# Altium PCB balance_car.PcbDoc (part 2 of 4)
Units mil, origin at the board's own origin, x right, y up, seen from the top; angles counter-clockwise.
Board outline 5041 x 1892 mil, 2 copper layers (Top Layer, Bottom Layer); 151 components, 112 nets, 599 pads, 108 vias.
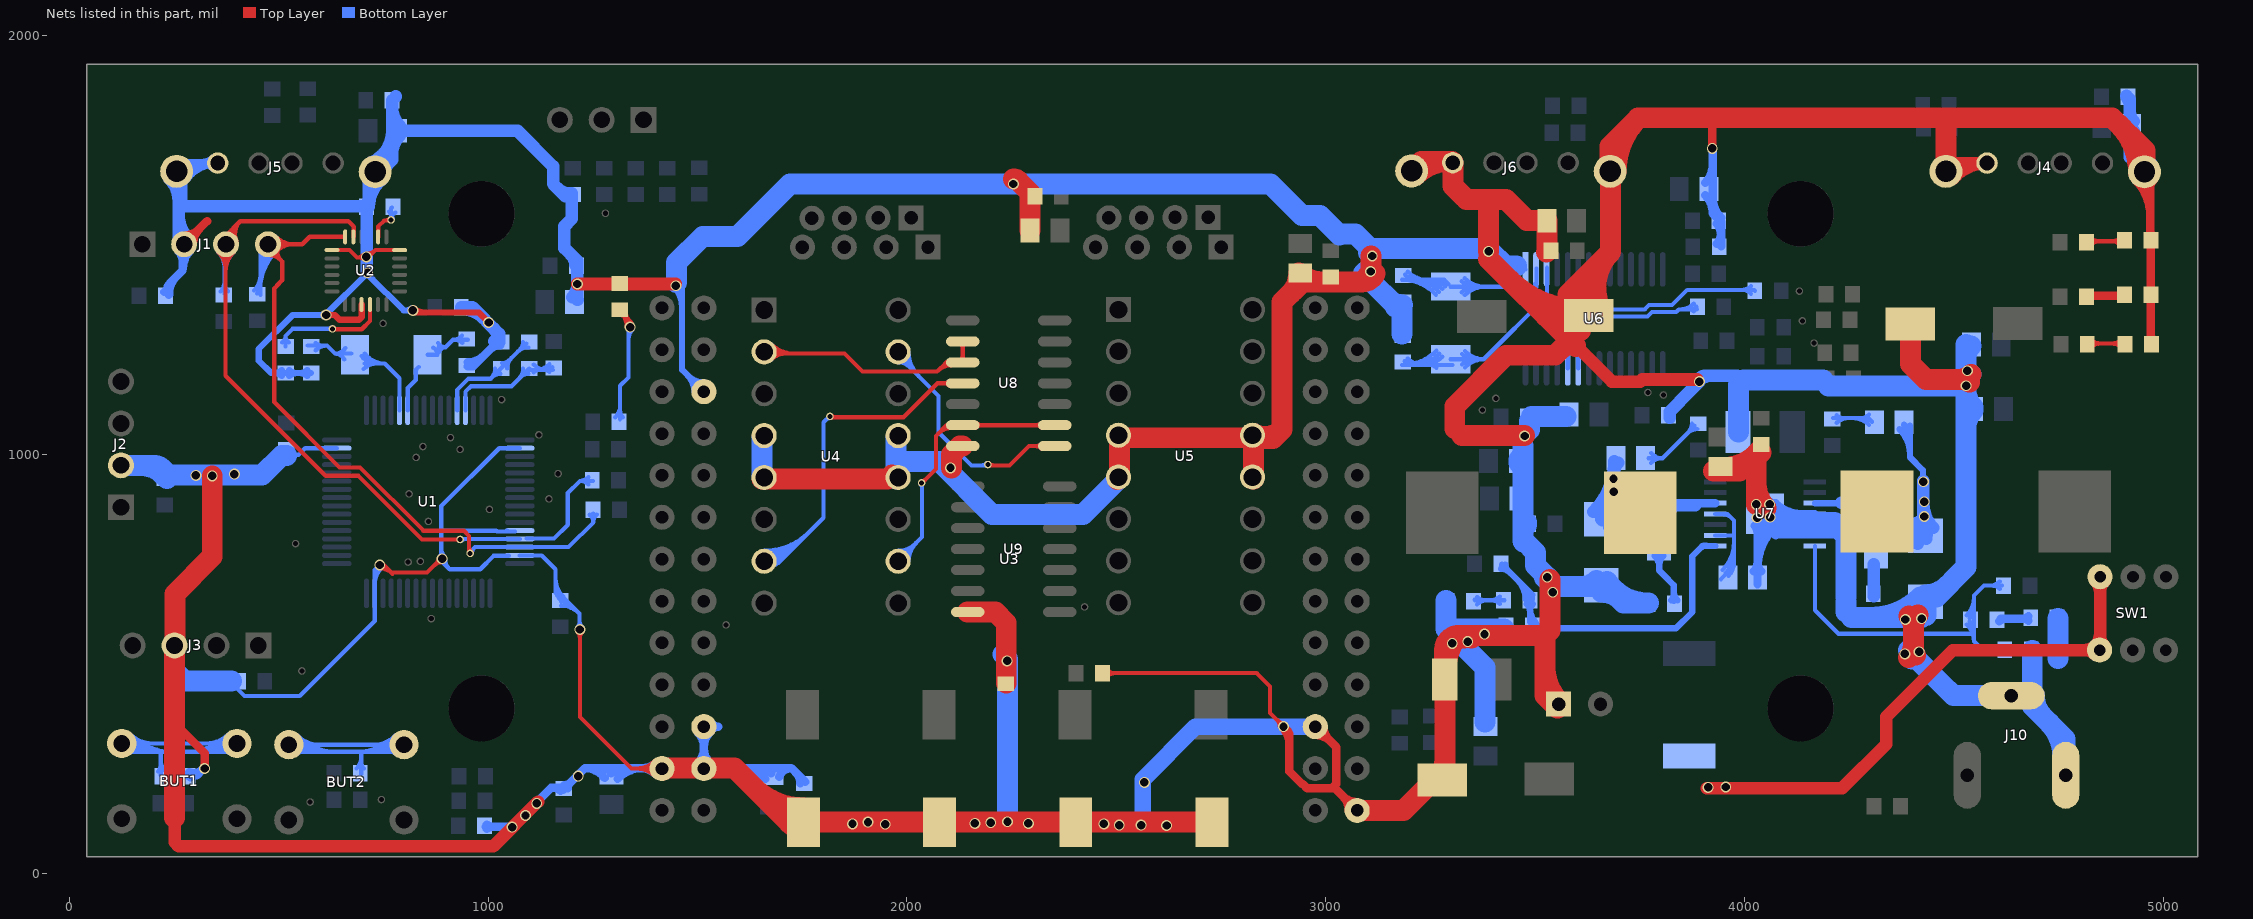
[diagram p2: the nets of this part, all layers, seen from the top]

## Via types
v1: diameter 26, hole 20, Top Layer to Bottom Layer, tented both sides, 108 vias

## Nets (pads, with @x,y where several pads share a name; then routed paths per layer and width w, separated by ;. In a path a pad name is that pad's centre, name@x,y a point inside that pad or via, vN(x,y) a via of type N, cw(c..) or ccw(c..) an arc to the next point about the centre after c; other vN are vias at no path point) (continued)
GND: C2.1 C3.1 C4.2 C5.2 C8.1 C9.2 C10.1 C11.2 C12.1 C14.2 C15.2 C17.1 C18.1 C19.1 C21.2 C24.2 C26.2 C30.1 C31.1 C32.2 C33.2 C34.1 C35.1 C36.1 C37.1 C38.1 C39.1 C40.1 C41.1 C42.1 C43.2 C44.1 C45.1 C46.1 C47.2 C48.1 C49.1 C51.1 C52.1 C55.2 C56.1 C57.1 C58.1 C59.2 C60.1 C61.2 C62.1 C63.1 C64.1 C65.1 C66.1 D1.2 D2.2 D3.2 D4.2 D5.1 D7.1 J1.2 J2.2 J3.3 J4.4 J4.5 J4.6 J5.4 J5.5 J5.6 J6.4 J6.5 J6.6 J7.1 J10.2 J10.3 L2.2 R2.1 R4.1 R9.1 R25.1 R35.2 R40.1 R41.1 R42.1 R44.2 R45.1 R46.1 R47.1 U1.18 U1.28 U1.31 U1.47 U1.63 U2.1 U2.9 U2.18 U3.13 U3.24 U3.29 U3.37 U3.38 U3.51 U4.4 U4.5 U4.12 U4.13 U5.4 U5.5 U5.12 U5.13 U6.1 U7.4 U7.5 U7.6 U7.15 U8.7 U9.7 | length 39133.7
  Top Layer w10: U2.1@627,1488 669,1488 687,1470 ; 694.51,1470 cw(c694.51,1457.51) v1@703.34,1466.34 ; v1@703,1470 687,1470 ; v1@702.97,1477.26 cw(c687,1491.2) 687,1470 ; v1@709.56,1479.98 ccw(c711.48,1507.52) 731,1488 ; v1@712,1469 731,1488 ; v1@741,728 cw(c741,684.54) 771.73,715.27 ; v1(741,736) 751,736 769,718 854,718 v1@886,750 ; v1@741,738 cw(c741,718.69) 754.66,732.34 ; U2.18@788.42,1488 731,1488 ; 871.22,735.22 cw(c890,716.44) v1@890,743 ; 878.46,742.46 ccw(c869.93,751) v1@882,751 ; v1@1213.34,576.34 cw(c1199.69,562.69) 1219,562.69 cw(c1238.31,562.69) v1@1224.66,576.34 ; v1(1219,582) 1219,373 1342,250 U3.51@1415,250 U3.51@1418,250 ; U3.51@1397.32,232.32 ccw(c1354.64,189.64) 1354.64,250 ccw(c1354.64,310.36) U3.51@1397.32,267.68 ; U3.51@1404.39,239.39 ccw(c1378.79,213.79) 1378.79,250 ccw(c1378.79,286.21) U3.51@1404.39,260.61 ; C18.1@2239,462 C18.1@2246,455 ; C19.1@2466.5,478 2835,478 2867,446 2867,383 v1@2896,354 ; C19.1@2475.49,469.01 cw(c2497.2,447.3) 2497.2,478 cw(c2497.2,508.7) C19.1@2475.49,486.99 ; 2884.64,365.36 cw(c2869.27,350) v1@2891,350 ; 2887.05,362.95 ccw(c2899,374.9) v1@2899,358
  Top Layer w15: v1@614,1333 634,1333 645,1322 691.5,1322 697.87,1328.37 U2.9@697.87,1358.08 ; v1@616.89,1329.11 cw(c626.28,1319.72) 626.28,1333 cw(c626.28,1346.28) v1@616.89,1336.89 ; v1@821,1346 827.89,1339.11 977.89,1339.11 v1@1000,1317 ; v1@823.89,1347.89 ccw(c845.08,1369.08) 845.08,1339.11 ; 990.9,1326.1 cw(c979.81,1315) v1@995.5,1315
  Top Layer w20: 252,358 323,287 v1(323,250) ; J3.3@252,517 252,553 J3.3@253,552 ; J1.2@274,1502 329,1557 ; J1.2@274,1523 ccw(c274,1573.7) 309.85,1537.85 ccw(c345.7,1502) J1.2@295,1502 ; U3.51@1418,250 U3.51@1420,250 ; C11.2@1739,122 C11.2@1753,122 ; v1@2894.5,352.5 v1@2898,349 ; v1@2896.88,347.88 cw(c2857.96,308.96) 2913,308.96 ; v1@2898,348 2913,333 2913,243 2943,213 2945.53,213 2955.53,203 3015,203 3025,213 3025,301 U3.24@2978,348 ; v1@2898.24,347.1 cw(c2893.24,327.98) 2913,327.98 ; U3.24@2975,330 cw(c2975,279.3) 3010.85,315.15 ; U3.24@2995,350 ccw(c3040.87,350) 3008.44,317.56 ; 3025,200 U3.13@3075,150 ; U3.13@3055,150 ccw(c3006.72,150) 3040.86,184.14 ccw(c3075,218.28) U3.13@3075,170 ; v1(3923,1731) 3923,1800 ; J4.5@4934.23,1654.23 cw(c4850.3,1570.3) 4969,1570.3 ; J4.5@4948.37,1668.37 cw(c4898.58,1618.58) 4969,1618.58 ; J4.5@4953,1677 J4.5@4955,1675 4956,1674 4969,1661 D4.2@4969,1511 ; 4969,1535.21 ccw(c4992.74,1535.21) D4.2@4975.95,1518.42 ; 4969,1637.89 cw(c4992.11,1637.89) J4.5@4975.77,1654.23 ; D2.2@4970,1263 D4.2@4970,1515 ; 4970,1287.21 ccw(c4993.74,1287.21) D2.2@4976.95,1270.42 ; 4970,1359.2 cw(c4990.32,1359.2) D3.2@4975.95,1373.58 ; 4970,1402.8 ccw(c4990.32,1402.8) D3.2@4975.95,1388.42 ; 4970,1489.2 cw(c4990.32,1489.2) D4.2@4975.95,1503.58
  Top Layer w30: 251,132.5 251,74.5 261,64.5 1012.5,64.5 v1@1119,171 ; v1(1213,1407) v1@1448,1407 ; 3602,1255 3683,1174 3751.16,1174 ; 3756.16,1179 v1@3887,1179 ; J4.6@4475,1678 4492.79,1695.79 J4.4@4579.2,1695.79 ccw(c4579.2,1588.89) J4.6@4499.23,1659.83
  Top Layer w50: 251,132.5 J3.3@251,544 ; J3.3@252,553 252,667 341,756 v1(341,949) ; U3.51@1417,247 1420,250 1421,251 1588,251 1717,122 C11.2@1753,122 v1(1907,122) C9.2@2078,122 C21.2@2403,122 C26.2@2728,122 ; 1633.41,205.59 ccw(c1753,325.18) C11.2@1753,156.06 ; U4.5@1654,941 1954,941 U4.12@1964,951 ; C11.2@1718.76,120.24 ccw(c1753,154.47) C11.2@1753,106.06 ; v1@2106,968 2106,1000 2126,1020 U8.7@2133,1020 ; U9.7@2145,624 2211,624 2237,598 C18.1@2237,454 ; 2274,1645 2294,1625 C17.1@2294,1535 ; U5.5@2503,940 2507,944 U5.4@2507,1040 ; U5.4@2516,1038 2518,1040 U5.13@2827,1040 ; U5.12@2827,941 U5.13@2827,1031 ; U5.13@2827.43,1050.37 ccw(c2855.33,1100.67) 2896,1060 ; U5.13@2828.54,1049.54 ccw(c2856.38,1077.38) 2856.38,1038 ; U5.13@2838,1038 2874,1038 2896,1060 ; 2914.57,1382.57 ccw(c2864.13,1433) C49.1@2935.46,1433 ; C49.1@2943.24,1431.33 ccw(c2989.9,1478) 2989.9,1412 ; U3.13@3075,150 3186,150 C15.2@3253,217 ; 3075.62,1412 ccw(c3075.62,1468.38) v1@3115.49,1428.51 ; v1@3108,1434 3086,1412 ; v1@3108,1437 v1@3108,1474 ; v1@3117.74,1431.65 cw(c3086,1447.46) 3086,1412 ; J6.6@3205,1677 3228,1700 3301,1700 J6.4@3302,1699 ; J6.6@3215.16,1666.84 cw(c3295.22,1586.78) J6.4@3295.22,1700 ; C15.2@3267.84,233.16 ccw(c3226.41,274.59) 3285,274.59 ; C15.2@3278,223 3285,230 C24.2@3285,459 ; C24.2@3284,463 3284,533 3319,568 ; C24.2@3288.97,483.51 cw(c3392.8,494.19) 3319,568 ; v1@3299.74,548.74 cw(c3339,509.47) v1@3339,565 ; v1@3301.5,550.5 cw(c3336.68,515.33) v1@3339.74,564.98 ; J6.4@3304,1696.79 3304,1641 3329,1616 ; 3308,1062 3308,1115 3430,1237 3548,1237 3583,1272 3583,1379 ccw(c3616.3,1379) C47.2@3610.72,1346.17 ; 3325,1045 v1@3475,1045 ; v1@3330.51,561.49 cw(c3346.24,545.76) 3346.24,568 ; 3331.76,568 cw(c3331.76,545.76) v1@3347.49,561.49 ; 3336,1609 3389,1609 ; 3389,1467 3576,1280 ; v1(3389,1485) 3389,1609 ; 3439.85,1416.15 ccw(c3608.32,1584.62) C47.2@3608.32,1346.37 ; 3523,495.74 ccw(c3647.74,495.74) J7.1@3559.54,407.54 ; 3525.2,1330.8 ccw(c3608.32,1413.91) C47.2@3608.32,1296.37 ; C66.1@3527,1484 3528.13,1485.13 C64.1@3528.13,1558 ; C64.1@3528,1559 3480,1559 3430,1609 3389,1609 ; v1@3535,701 3535,580 3523,568 ; J7.1@3553,394 3523,424 3523,568 ; 3565.35,1254.35 ccw(c3495.63,1324.06) C47.2@3593.98,1330.99 ; 3578.5,1381.5 3680,1483 ; 3583,1266.88 cw(c3641.9,1266.88) C47.2@3614.9,1319.23 ; 3597,1258 3597,1259 ; C47.2@3616.63,1314.54 cw(c3705.33,1364.41) 3633.37,1436.37 ; C47.2@3660.21,1339.04 cw(c3765.02,1397.97) 3680,1483 ; J6.5@3679,1676 3679,1736 3747,1804 4481,1804 ; J6.5@3680,1672 3680,1483 ; J6.5@3682,1672 J6.5@3682,1679 ; J6.5@3693.37,1676 cw(c3872.92,1676) 3745.96,1802.96 ; C31.1@3926.05,960.68 3987.68,960.68 4034,1007 C30.1@4034,1008 ; C31.1@3948.91,968.77 ccw(c3948.91,1081.92) 4028.91,1001.91 ; v1(4028,881) 4028,994 4039,1005 ; 4028,929.28 ccw(c4108.28,929.28) v1@4051.51,872.51 ; v1@4391.49,515.51 ccw(c4363.69,543.31) 4403,543.31 ; v1@4392.49,614.49 cw(c4367.1,589.1) 4403,589.1 ; C55.2@4396,1311 4396,1216 4433,1179 4525,1179 ; 4403,524 4403,607 ; 4403,533.83 ccw(c4421.83,533.83) v1@4408.51,520.51 ; J4.6@4479,1668 4481,1670 J4.6@4481,1676 4481,1804 ; 4510.27,1179 ccw(c4510.27,1221.73) v1@4540.49,1191.51 ; 4521.76,1179 cw(c4521.76,1156.76) v1@4537.49,1172.49 ; 4893.7,1788.3 cw(c4780.4,1675) J4.5@4940.63,1675 ; J4.5@4956,1667 4956,1674 4956,1726 4878,1804 4481,1804 ; 2896,1060 2896,1364 2944,1412 3086,1412 ; v1@3293.51,557.49 cw(c3318.9,532.1) 3318.9,568 ccw(c3318.9,532.1) v1@3293.51,557.49 ; v1@3293.51,557.49 ccw(c3316.49,534.51) 3284,534.51 cw(c3316.49,534.51) v1@3293.51,557.49 ; 3319,568 3523,568 ; v1@2254,1658 cw(c2254,1641.1) 2265.95,1653.05 ccw(c2254,1641.1) v1@2254,1658 ; 4403,588.69 cw(c4442.31,588.69) 4414.51,616.49 ccw(c4442.31,588.69) 4403,588.69
  Bottom Layer w10: C45.1@394,451 394,447 418,423 550,423 729.05,602.05 U1.47@729.05,668.5 729.05,724.05 v1(741,736) ; C36.1@522.68,1012.59 ccw(c536.69,1013.01) C36.1@536.69,999 ; C36.1@525,999 547,999 ; C36.1@532.68,1012.89 ccw(c547,1013.33) 547,999 ; U1.63@638.5,1014.95 562.95,1014.95 547,999 ; U1.47@729.05,687.83 cw(c789.17,687.83) v1@746.66,730.34 ; 729.05,711.97 cw(c765.03,711.97) v1@739.59,737.41 ; v1@884.34,756.66 ccw(c875.51,765.49) 888,765.49 ; 888,775.14 ccw(c914.14,775.14) v1@895.66,756.66 ; 889,818 1019.32,818 ; v1@897.9,749.76 ccw(c921.11,746.11) 904.5,729.5 ; 1021,816.32 U1.28@1064,816.32 ; 1039.49,816.32 ccw(c1039.49,824.58) U1.28@1045.34,818.74 ; U1.31@1049,758 1013,758 981,726 908,726 888,746 888,876.66 1026.3,1014.95 U1.18@1075.5,1014.95 ; U1.31@1075.5,759.05 1127.95,759.05 1161,726 1161,669 C37.1@1166,664 ; 1161,679.86 ccw(c1198.39,679.86) C37.1@1171.95,653.42 ; 1161,704 ccw(c1222.54,704) C37.1@1179.02,660.49 ; C37.1@1169,661 1177,661 1218,620 v1@1218,585 ; C37.1@1173.97,638.78 cw(c1173.97,577.82) 1217.08,620.92 ; C37.1@1173.97,648.78 cw(c1173.97,611.96) 1200.01,637.99 ; v1@1213.34,587.66 ccw(c1202.1,598.9) 1218,598.9 ; 1218,603.73 ccw(c1240.73,603.73) v1@1224.66,587.66 ; 3455.31,1442 U6.1@3477,1442
  Bottom Layer w15: C44.1@506.81,1187.28 ccw(c489.37,1169.84) 489.37,1194.5 ccw(c489.37,1219.17) C44.1@506.81,1201.73 ; C44.1@525.19,1187.28 cw(c542.63,1169.84) 542.63,1194.5 cw(c542.63,1219.17) C44.1@525.19,1201.73 ; C5.2@567.81,1187.28 ccw(c550.37,1169.84) 550.37,1194.5 ccw(c550.37,1219.17) C5.2@567.81,1201.73 ; C5.2@577,1194.5 481.5,1194.5 452,1224 452,1252 533,1333 v1@611,1333 ; v1@609.11,1329.11 ccw(c599.72,1319.72) 599.72,1333 ccw(c599.72,1346.28) v1@609.11,1336.89 ; v1@611,1332 v1@611,1333 ; v1(613,1333) v1@611,1333 ; v1@618.5,1333 cw(c636.61,1333) 623.8,1345.8 ; v1@706.5,1434 cw(c693.22,1434) 702.61,1424.61 cw(c712,1415.22) v1@712,1428.5 ; v1(712,1434) v1@611,1333 ; v1@715,1427 798,1344 v1(820,1344) ; v1@717.5,1434 ccw(c740.44,1434) 724.22,1417.78 ; v1@816.11,1340.11 ccw(c806.72,1330.72) 806.72,1344 ccw(c806.72,1357.28) v1@816.11,1347.89 ; v1@1444.11,1399.11 cw(c1398.51,1353.51) 1463,1353.51 ; v1@1454.72,1396.28 ccw(c1434.72,1416.28) 1463,1416.28 ; v1@1454.72,1409.72 cw(c1434.72,1389.72) 1463,1389.72 ; 1463,1411 1463,1202 U3.29@1515,1150 ; U3.29@1492.5,1150 ccw(c1438.18,1150) 1476.59,1188.41 ccw(c1515,1226.82) U3.29@1515,1172.5 ; U3.29@1507,1144 U3.29@1511,1144 ; U7.15@4028.07,848.18 ccw(c4085.17,866.91) 4085.17,806.82 ; U7.15@4042.32,852.86 ccw(c4105.88,873.7) 4105.88,806.82 ; U7.15@4056.58,857.53 ccw(c4126.58,880.5) 4126.58,806.82 ; U7.15@4070.83,862.21 ccw(c4147.29,887.29) U7.6@4147.29,806.82 ; 4074.18,806.82 U7.6@4168,806.82 ; U7.15@4085.08,866.88 ccw(c4168,894.08) U7.6@4168,806.82 ; R46.1@4232,658 4232,655 R46.1@4235,652 ; 4232,790.64 4215.82,806.82 U7.6@4168,806.82 ; C34.1@4915.5,1852.5 C34.1@4915.5,1854 ; J4.5@4958,1678 J4.5@4959,1677
  Bottom Layer w20: C46.1@226.24,1387.96 ccw(c216.89,1408) 239,1408 ; C46.1@236.12,1384.92 cw(c252.39,1394.61) 239,1408 ; C46.1@237.21,1380.97 cw(c298.16,1380.97) 255.06,1424.06 ; C46.1@239,1382 239,1408 ; J1.2@259.15,1487.15 cw(c230.54,1458.54) 271,1458.54 ; J5.6@263.5,1670.39 cw(c314.25,1632.4) 314.25,1695.79 ; J5.6@266.79,1695.79 J5.4@354.2,1695.79 ccw(c354.2,1602.49) J5.6@279.51,1658.4 ; 270,1439 239,1408 ; 271,1444 J1.2@271,1496 ; 271,1444.06 cw(c331.94,1444.06) J1.2@288.85,1487.15 ; R35.2@282,234 304,234 318,248 cw(c296.85,269.15) R35.2@286.23,241.18 ; R35.2@288.95,228.51 cw(c302.2,215.26) 302.2,234 ; R35.2@288.95,239.42 ccw(c302.05,252.52) 302.05,234 ; J5.4@343.18,1684.76 ccw(c316.57,1658.15) 316.57,1695.79 ccw(c316.57,1733.43) J5.4@343.18,1706.81 ; C4.2@950.97,1220.22 ccw(c950.97,1276.36) 990.66,1236.66 ; C4.2@951,1210 964,1210 L2.2@1019,1265 ; R40.1@994,111 1057,111 1150,204 C12.1@1170,204 ; R40.1@996.95,105.58 cw(c1010.05,92.48) 1010.05,111 ; R40.1@996.95,116.49 ccw(c1010.2,129.74) 1010.2,111 ; 1004.7,1250.7 cw(c1029.03,1226.37) L2.2@1029.03,1260.78 ; 1075.34,129.34 cw(c1089,115.69) v1@1089,135 ; v1@1092,138 cw(c1111.31,138) 1097.66,151.66 ; 1155.77,204 cw(c1155.77,180.24) C12.1@1172.58,197.04 ; C12.1@1179,199 1231,251 ; C12.1@1181.97,210.21 ccw(c1181.97,230.12) C12.1@1196.04,216.04 ; C12.1@1189.69,202.5 cw(c1207.04,202.5) C12.1@1194.77,214.77 ; C8.1@1270.69,251 cw(c1270.69,221.98) C8.1@1294.01,239.25 ; C8.1@1277.94,227.35 ccw(c1231,192.61) 1231,251 ; C8.1@1294.7,240.07 cw(c1321.08,213.69) C8.1@1321.08,251 ; C8.1@1308.84,225.93 cw(c1369.37,165.41) 1369.37,251 ; 1364.3,251 cw(c1364.3,199.3) U3.51@1400.86,235.86 ; 1369.13,251 ccw(c1369.13,295.87) U3.51@1400.86,264.14 ; U3.51@1429.14,235.86 cw(c1465.7,199.3) 1465.7,251 ; U3.51@1429.14,264.14 ccw(c1460.87,295.87) 1460.87,251 ; 1464.3,251 cw(c1464.3,199.3) U3.38@1500.86,235.86 ; 1469.13,251 ccw(c1469.13,295.87) 1500.86,264.14 ccw(c1466.72,298.28) 1515,298.28 ccw(c1563.28,298.28) 1529.14,264.14 ccw(c1560.87,295.87) 1560.87,251 ; U3.37@1500.86,335.86 cw(c1466.72,301.72) 1515,301.72 cw(c1563.28,301.72) U3.37@1529.14,335.86 ; U3.38@1515,253 U3.37@1515,350 1549,350 ; U3.38@1529.14,235.86 cw(c1565.7,199.3) 1565.7,251 ; U3.37@1532.48,340.28 cw(c1549,331.1) 1549,350 ; U3.37@1532.48,359.72 ccw(c1549,368.9) 1549,350 ; 1599.22,251 cw(c1599.22,161.99) C3.1@1662.16,224.93 ; 1647.5,251 cw(c1647.5,210.28) C3.1@1676.3,239.07 ; C3.1@1694.91,229.93 cw(c1724,220.39) 1724,251 ; 1734.57,240.43 cw(c1708.65,214.5) C2.1@1745.32,214.5 ; C2.1@1757,218 1724,251 ; C59.2@3906.06,1619.16 cw(c3862.76,1575.86) C61.2@3924,1575.86 ; C59.2@3906.06,1648.84 ccw(c3862.76,1692.14) 3924,1692.14 ; C59.2@3924,1613.59 ccw(c3992.12,1613.59) C61.2@3943.95,1565.42 ; v1@3924,1733 3924,1576 C61.2@3942,1558 ; C61.2@3933.04,1550.58 cw(c3906.58,1524.11) 3944,1524.11 ; R25.1@3934.04,1503.42 ccw(c3909.99,1527.47) 3944,1527.47 ; R25.1@3944,1497 C61.2@3944,1555 ; C51.1@4021.93,720.84 ccw(c4000.03,742.74) 4031,742.74 ; U7.15@4023.92,829.96 cw(c4006.82,812.87) U7.15@4031,812.87 ; C51.1@4031,690 4031,819 U7.15@4035,823 ; C51.1@4031,725.95 cw(c4178.09,725.95) U7.15@4074.08,829.96 ; 4031,742.09 ccw(c4061.05,742.09) C51.1@4039.8,720.84 ; 4031,774.24 cw(c4129.81,774.24) U7.15@4059.94,844.11 ; U7.15@4060,821 4074.18,806.82 ; U7.15@4061.2,864.56 ccw(c4127.04,915.89) 4127.04,832.41 ; U7.15@4063.12,847.88 cw(c4087.56,823.44) U7.15@4087.56,858 ; U7.15@4071,858 U7.4@4168,858 ; U7.15@4074.08,832.92 cw(c4134.64,772.36) 4134.64,858 cw(c4134.64,943.64) U7.15@4074.08,883.08 ; U7.15@4076.97,876.86 ccw(c4167.99,947.83) 4167.99,832.41 U7.15@4088.59,832.41 ; 1231,251 1724,251
  Bottom Layer w30: J5.6@238.77,1658.77 cw(c185.09,1605.09) 261,1605.09 ; J5.6@239.01,1658.53 cw(c174.6,1592.28) 267,1592.28 ; 261,1572.01 ccw(c344.01,1572.01) J1.2@285.31,1513.31 ; 261,1629.24 cw(c302.76,1629.24) J5.6@273.23,1658.77 ; J1.2@274,1493 271,1496 261,1506 261,1687 267,1681 267,1593 ; C43.2@707.58,1594.89 ccw(c689.68,1612.8) 715,1612.8 ; v1@709.5,1438.5 C43.2@709.5,1591 ; C43.2@715,1591.64 cw(c798.56,1591.64) J5.5@745.48,1656.18 ; J5.5@720.91,1697.61 ccw(c691.4,1771) 770.5,1771 770.5,1703.5 J5.5@736,1669 ; J5.5@732.1,1669.78 ccw(c709.25,1726.6) 770.5,1726.6 ; J5.5@734.5,1670.5 715,1651 715,1593 267,1593 ; 770.5,1716.38 cw(c834.58,1716.38) C65.1@789.27,1761.69 ; C65.1@770.5,1773 C63.1@770.5,1846 ; C63.1@770.5,1829.62 ccw(c834.58,1829.62) C65.1@789.27,1784.31 ; C65.1@771,1771 773,1773 C65.1@783.87,1773 1070,1773 1155,1688 1155,1646 1184,1617 R9.1@1197,1617 ; C63.1@779,1855 C63.1@779.25,1854.75 ; R41.1@935.5,1347.31 cw(c935.5,1272.02) 988.74,1325.26 ; R41.1@935.5,1352 962,1352 1026,1288 L2.2@1026,1270 ; R41.1@936.32,1347.44 cw(c948.34,1309.87) 976.24,1337.76 ; 1012.75,1301.25 cw(c979.99,1268.5) L2.2@1026.32,1268.5 ; L2.2@1014,1270 L2.2@1024,1270 ; 1164.77,1636.23 ccw(c1196.5,1667.96) R9.1@1199.83,1623.21 ; 1197.7,1477.3 cw(c1173.37,1452.97) C39.1@1207.78,1452.97 ; R9.1@1200,1618 1200,1563 1182,1545 1182,1493 1213,1462 v1(1213,1407) 1213,1370 C38.1@1214,1369 ; C56.1@3821,1088 3821,1101.85 3845,1125.85 ; 3845,1127 v1(3892,1174) ; v1@3890.02,1174.31 cw(c3906,1171.83) 3906,1188 3983,1188 ; v1@3890.59,1175.41 cw(c3920.97,1145.03) 3920.97,1188 ; C34.1@4912,1856 4915.5,1852.5 4920,1848 4920,1710 J4.5@4955,1675 ; C34.1@4913.58,1850.11 cw(c4898.06,1834.6) C34.1@4920,1834.6 ; 4920,1745.91 ccw(c5025.91,1745.91) J4.5@4951.02,1671.02 ; 4920,1750.32 cw(c4951.64,1750.32) C35.1@4929.27,1772.69 ; 4920,1817.68 ccw(c4951.64,1817.68) C35.1@4929.27,1795.31 ; 4920,1818.33 ccw(c5098.33,1818.33) J4.5@4972.23,1692.23 ; 267,1593 264,1593 267,1590 267,1593 ; C38.1@1200.47,1375.31 ccw(c1170.2,1405.57) v1@1213,1405.57 ; C38.1@1200.47,1375.31 ccw(c1170.2,1405.57) v1@1213,1405.57 ; C38.1@1200.47,1375.31 ccw(c1170.2,1405.57) v1@1213,1405.57
  Bottom Layer w40: v1@2563,119 2563,224 2689,350 v1(2899,350) U3.24@2975,350
  Bottom Layer w50: J2.2@123,974 200,974 ; 167.56,974 cw(c167.56,884.02) C42.1@231.18,947.65 ; C42.1@217,957 200,974 ; C42.1@223,951 460,951 507,998 C36.1@519,998 ; C42.1@233.3,943.02 ccw(c200,940.62) 200,974 ; J3.3@251,544 251,483 275,459 C45.1@387,459 ; v1@1450,1411 1450,1458 1512.34,1520.34 1595.34,1520.34 1721,1646 v1(2254,1646) 2868,1646 2943,1571 2986,1571 3033,1524 ; U4.5@1654,944 U4.4@1654,1041 ; U4.13@1974,1041 1974,983 ; U4.12@1975,941 1974,942 1974,983 ; 2229,523 2240,512 v1(2240,123) ; U5.5@2501,938 2420,857 2203,857 2077,983 1974,983 ; 3037,1526 3071,1526 3100.5,1496.5 ; 3089.93,1432.07 ccw(c3107,1449.14) v1@3107,1425 ; v1@3095,1437 ccw(c3119.14,1437) 3102.07,1419.93 ; v1@3102.51,1482.49 cw(c3125.49,1459.51) 3125.49,1492 ; 3105,1417 3166,1356 C33.2@3166,1352 ; 3111,1492 v1@3387,1492 ; 3151.87,1370.13 ccw(c3183.03,1401.28) C33.2@3183.03,1357.22 ; C32.2@3182,1288 C33.2@3182,1353 ; R42.1@3287,651 3287,584 ; 3295.54,583 cw(c3295.54,509.54) v1@3347.49,561.49 ; v1@3302,561 cw(c3302,541.69) 3315.66,555.34 ; 3323.64,547.36 ccw(c3339,562.73) v1@3339,541 ; v1@3327,553 ccw(c3348.73,553) 3333.36,537.64 ; v1@3330.51,561.49 cw(c3382.46,509.54) v1@3382.46,583 ; C52.1@3380,361 3380,491 3288,583 ; v1@3391.5,1487.5 3429,1450 3455.31,1450 ; R4.1@3426,583 3288,583 ; C40.1@3461.54,979.76 cw(c3438.69,956.92) C40.1@3471,956.92 ; C40.1@3461.54,988.24 ccw(c3438.69,1011.08) C40.1@3471,1011.08 ; R44.2@3471,818.01 cw(c3499.52,818.01) R44.2@3479.35,838.18 ; R44.2@3471,851.99 ccw(c3499.52,851.99) R44.2@3479.35,831.82 ; 3471,1021 3471,793 3472.5,791.5 ; 3474,793 3501,766 3501,735 v1@3522.38,713.62 ; 3486,1059 C60.1@3486,1080 ; C60.1@3491,1091 C62.1@3574,1091 ; v1(3529,707) v1@3522.38,713.62 ; 3612.28,685 ccw(c3612.28,733.32) D5.1@3646.45,699.15 ; D5.1@3635,685 3543,685 3522.38,705.62 v1@3522.38,713.62 ; D5.1@3658,671.26 cw(c3658,606.7) 3703.65,652.35 ; D5.1@3666,690 3711,645 3771,645 cw(c3771,766.45) D5.1@3671.4,696.95 ; C10.1@3986,1054 3986,1167 ; 3997,1178 4187,1178 ; U7.15@4060,837 4061,838 4215,838 4242,811 R46.1@4242,658 ; U7.15@4063.48,869.52 ccw(c4139.58,945.63) 4139.58,838 ; 4201,1164 v1(4529,1164) 4529,731 4458,660 D7.1@4433.57,660 ; 4242,624 4242,648 ; 4255,611 D7.1@4423,611 ; 4301.78,611 ccw(c4301.78,778.81) D7.1@4420.45,660.15 ; 4400,524 4400,523 4468.5,454.5 ; v1@4405,529 ccw(c4431.56,529) 4412.78,510.22 ; D7.1@4431,660 D7.1@4433.57,660 ; D7.1@4432,664.94 ccw(c4432,739.63) 4484.81,686.81 ; D7.1@4433.57,615.43 D7.1@4433.57,660 ; 4442,481 4468.5,454.5 ; 4474.06,1164 ccw(c4474.06,1257.94) v1@4540.49,1191.51 ; 4529,1065.02 cw(c4585.21,1065.02) C58.1@4545.46,1104.76 ; v1@4529,1152.98 ccw(c4585.21,1152.98) C58.1@4545.46,1113.24 ; v1@4529,1200 C57.1@4529,1263 ; 4529,1231.09 cw(c4568.14,1231.09) C57.1@4540.46,1258.76 ; J10.2@4637,424 4499,424 4468.5,454.5 ; R45.1@4687,532 4687,399 4765,321 J10.3@4765,226 ; J10.2@4692,424 ccw(c4764.43,424) 4713.21,372.79 ; 4727.68,358.32 cw(c4650.86,281.5) J10.3@4759.5,281.5 ; 4746.25,339.75 cw(c4707.1,300.59) J10.3@4759.85,283.78 ; 4749,513 R47.1@4749,608 ; 3287,584 3287,583 3288,583 ; 3287,584 3288,583 ; 3308.34,562.66 cw(c3294.69,549) v1@3314,549 ; 3308.34,562.66 cw(c3294.69,549) v1@3314,549 ; 3308.34,562.66 cw(c3294.69,549) v1@3314,549 ; v1@4391.49,532.49 cw(c4370.93,511.93) 4400,511.93 ccw(c4370.93,511.93) v1@4391.49,532.49
  other v1: 1057,110 2620,114 2507,115 2559,115 1948,117 1870,118 2470,118 2162,119 2290,119 2200,121 1089,138 1116,167 2567,217 1215,232 2239,507 4383,524 4417,529 3302,549 3339,553 3379,571 4384,606 4423,608 3542,671 890,751 4030,849 4061,850 4060,881 302,950 394,953 2104,968 3475,1044 4532,1200 1001,1315 1448,1403 3107,1437 709,1472 3111,1474
I2C_SCK: J1.3 pad.28 R29.2 R36.1 U1.29 U2.23 | length 2480.1
  Top Layer w10: J1.3@355.62,1483.62 cw(c313.64,1441.64) 373,1441.64 ; J1.3@362.69,1490.69 cw(c337.79,1465.79) 373,1465.79 ; 373,1436.82 cw(c439.18,1436.82) J1.3@392.38,1483.62 ; 373,1460.96 cw(c415.04,1460.96) J1.3@385.31,1490.69 ; J1.3@373,1510 373,1188 612,949 690.04,949 842.04,797 pad.28@933,797 ; J1.3@374,1498 J1.3@374,1502 374,1523 408,1557 ; J1.3@379.6,1504.15 cw(c406.83,1514.59) 386.21,1535.21 ; J1.3@388.94,1507.73 cw(c422.58,1520.63) 397.1,1546.1 ; J1.3@398.28,1511.31 cw(c438.33,1526.66) 408,1557 ; U2.23@678.18,1519.5 U2.23@678.18,1520 ; U2.23@679,1520 679,1544 666,1557 408,1557 ; pad.28@930.17,794.17 ccw(c923.34,787.34) 923.34,797 ccw(c923.34,806.66) pad.28@930.17,799.83
  Bottom Layer w10: J1.3@355.62,1483.62 cw(c320.89,1448.89) 370,1448.89 ; R36.1@360.98,1389.49 ccw(c339.19,1411.27) 370,1411.27 ; R36.1@370,1383 370,1493 J1.3@371,1494 ; 370,1411.12 ccw(c400.59,1411.12) R36.1@378.96,1389.49 ; 370,1429.57 cw(c446.43,1429.57) J1.3@392.38,1483.62 ; 370,1453.72 cw(c422.28,1453.72) J1.3@385.31,1490.69 ; pad.28@935.42,798.42 986,798.42 ; pad.28@935.83,794.17 cw(c946.08,783.92) 946.08,798.42 ; 978.58,798.42 986,798.42 ; U1.29@1075.5,798.42 986,798.42 ; U1.29@1092,799 1157,799 1190,832 1190,908 1219,937 ; R29.2@1239.24,945.75 cw(c1219,964.8) 1219,937 ; R29.2@1239.27,928.28 ccw(c1219,909.07) 1219,937 ; R29.2@1250,937 1219,937
I2C_SDA: J1.4 pad.29 R30.2 R37.1 U1.30 U2.24 | length 2374.9
  Top Layer w10: J1.4@474,1502 556,1502 574,1520 U2.24@657,1520 ; J1.4@475.04,1476.02 cw(c476.61,1436.62) 504.5,1464.5 cw(c523.47,1483.47) J1.4@498.35,1492.88 ; J1.4@477,1496 477,1492 J1.4@477.5,1491.5 ; J1.4@482,1496 482,1487 508,1461 508,1416 495,1403 ; J1.4@485.31,1490.69 cw(c512.63,1463.37) 512.63,1502 cw(c512.63,1540.63) J1.4@485.31,1513.31 ; J1.4@488.98,1496.39 ccw(c507.48,1489.46) 493.51,1475.49 ; J1.4@492.38,1483.62 cw(c536.77,1439.23) 536.77,1502 cw(c536.77,1564.77) J1.4@492.38,1520.38 ; 495.5,1402.5 489,1396 489,1125 645,969 694.08,969 845.08,818 941.7,818 954,805.7 954,767 pad.29@957,764 ; 954,780.9 ccw(c973.9,780.9) pad.29@959.83,766.83
  Bottom Layer w10: R37.1@440.98,1391.49 ccw(c404.71,1427.76) 456,1427.76 ; R37.1@448.05,1384.42 ccw(c428.85,1403.62) 456,1403.62 ; R37.1@456,1381 456,1479 J1.4@472,1495 ; R37.1@456,1395.77 cw(c580.23,1395.77) J1.4@492.38,1483.62 ; 456,1419.92 cw(c556.08,1419.92) J1.4@485.31,1490.69 ; 456,1444.06 cw(c531.94,1444.06) J1.4@478.24,1497.76 ; 456,1468.2 cw(c507.8,1468.2) J1.4@471.17,1504.83 ; J1.4@479,1500 J1.4@480,1499 ; J1.4@482,1501 J1.4@495.5,1487.5 ; pad.29@956,766 968.73,778.73 996,778.73 ; pad.29@961,764 cw(c977.9,764) 965.95,775.95 ; 986.73,778.73 996,778.73 ; R30.2@1242.41,856.22 cw(c1227.37,838) 1251,838 ; R30.2@1251,859 1251,838 ; R30.2@1259.16,856.72 ccw(c1276.55,838) 1251,838 ; 996,778.73 U1.30@1075.5,778.73 1191.73,778.73 1251,838
L-1A+: U4.2 U8.2 U8.3 | length 787.7
  Top Layer w10: U4.2@1654,1241 1851,1241 1894,1198 2072,1198 2094,1220 U8.3@2133,1220 U8.3@2134,1220 ; U4.2@1669.61,1255.61 ccw(c1704.87,1290.87) 1704.87,1241 ; U4.2@1676.68,1227.32 cw(c1709.7,1194.3) 1709.7,1241 ; U4.2@1676.68,1262.68 ccw(c1729.01,1315.01) 1729.01,1241 ; 2074.27,1200.27 cw(c2105,1169.54) U8.3@2105,1213 ; 2091.34,1217.34 cw(c2105,1203.69) U8.3@2105,1223 ; U8.3@2128.05,1224.95 ccw(c2116.1,1236.9) 2133,1236.9 ccw(c2149.9,1236.9) U8.3@2137.95,1224.95 ; U8.2@2128.05,1265.05 cw(c2116.1,1253.1) 2133,1253.1 cw(c2149.9,1253.1) U8.2@2137.95,1265.05 ; U8.2@2133,1270 2133,1227 U8.3@2134,1226
L-1A-: pad.1 U4.7 U8.4 | length 1307
  Top Layer w10: pad.1@1818,1090 1819,1089 1839,1089 ; pad.1@1819.2,1093.4 ccw(c1828,1100) 1828,1089 1839,1089 ; U8.4@2100.05,1165.05 ccw(c2088.1,1153.1) 2088.1,1170 ccw(c2088.1,1186.9) U8.4@2100.05,1174.95 ; U8.4@2133,1170 2073,1170 1992,1089 1839,1089 ; pad.1@1818.83,1093.83 ccw(c1830.49,1105.49) 1830.49,1089 cw(c1830.49,1105.49) pad.1@1818.83,1093.83
  Bottom Layer w10: U4.7@1654,741 1693,741 ; U4.7@1659,730 ccw(c1659,785.53) 1698.26,746.26 ; U4.7@1659,740 ccw(c1659,819.67) 1715.33,763.33 ; U4.7@1659,750 ccw(c1659,853.81) 1732.41,780.41 ; U4.7@1659,760 ccw(c1659,887.95) 1749.48,797.48 ; U4.7@1659,770 ccw(c1659,922.1) 1766.55,814.55 ; U4.7@1681.35,733.81 cw(c1693,727.98) 1693,741 ; U4.7@1683.69,748.94 ccw(c1693,750.43) 1693,741 ; 1807.46,1083.46 cw(c1816,1074.93) pad.1@1816,1087 ; pad.1@1815,1091 1801,1077 1801,849 1693,741
L-1B+: pad.2 U4.10 U8.6 U8.9 | length 909.6
  Top Layer w10: pad.2@2035,936 ccw(c2035,948.07) 2043.54,939.54 ; pad.2@2036,932 2069,965 2069,1044 2095,1070 U8.6@2133,1070 ; 2075.98,1050.98 cw(c2105,1021.96) U8.6@2105,1063 ; 2093.05,1068.05 cw(c2105,1056.1) U8.6@2105,1073 ; U8.6@2136,1070 U8.9@2353,1070 ; U8.6@2165.95,1065.05 cw(c2177.9,1053.1) 2177.9,1070 cw(c2177.9,1086.9) U8.6@2165.95,1074.95 ; U8.9@2320.05,1065.05 ccw(c2308.1,1053.1) 2308.1,1070 ccw(c2308.1,1086.9) U8.9@2320.05,1074.95
  Bottom Layer w10: U4.10@1974,741 2036,803 2036,936 pad.2@2037,937 ; U4.10@1979,760 ccw(c1979,793.8) 2002.9,769.9 ; U4.10@1979,770 ccw(c1979,827.94) 2019.97,786.97 ; U4.10@1994,745 cw(c2032.63,745) 2005.31,772.31 ; U4.10@2004,745 cw(c2066.77,745) 2022.38,789.38 ; pad.2@2032.17,929.17 cw(c2022.93,919.93) 2036,919.93
L-1B-: pad.3@2193,976 U4.15 U8.8 | length 750.4
  Top Layer w10: pad.3@2193,976 pad.3@2198,976 ; pad.3@2195.83,978.83 ccw(c2207.49,990.49) 2207.49,974 ; pad.3@2198,974 2245,974 2291,1020 U8.8@2353,1020 ; U8.8@2320.05,1015.05 ccw(c2308.1,1003.1) 2308.1,1020 ccw(c2308.1,1036.9) U8.8@2320.05,1024.95
  Bottom Layer w10: U4.15@1974,1241 2075,1140 2075,1053 2154,974 pad.3@2191,974 ; U4.15@1979,1220 cw(c1979,1181.37) 2006.31,1208.69 ; U4.15@1994,1245 ccw(c2051.94,1245) 2010.97,1204.03 ; U4.15@2004,1245 ccw(c2086.08,1245) 2028.04,1186.96 ; 2178.51,974 ccw(c2178.51,990.49) pad.3@2190.17,978.83
LED1: R27.2 U6.23 | length 464.3
  Bottom Layer w10: U6.23@3602.98,1205.78 3602.98,1290 3603,1302 3630.5,1329.5 3768.58,1329.5 3779.08,1340 3837,1340 3843,1346 3868,1346 ; 3844.66,1346 ccw(c3844.66,1393.88) R27.2@3878.51,1360.02 ; 3868,1347 R27.2@3886,1347 ; 3868.8,1346 ccw(c3868.8,1369.74) R27.2@3885.58,1352.95 ; 3868.95,1346 cw(c3868.95,1332.48) R27.2@3878.51,1342.04
LED2: R26.2 U6.24 | length 646.4
  Bottom Layer w10: U6.24@3577.79,1205.78 3577.79,1266 ; 3578,1266 3578,1330 3594.5,1346.5 3761.54,1346.5 3772.04,1357 3827.04,1357 3863.04,1393 4023,1393 R26.2@4025,1391 ; 3993.73,1393 cw(c3993.73,1362.19) R26.2@4015.51,1383.98 ; 3993.88,1393 ccw(c3993.88,1423.59) R26.2@4015.51,1401.96
NetBUT1_2: BUT1.2 R35.1 | length 1680.7
  Bottom Layer w10: BUT1.2@130,290 BUT1.2@400,290 ; BUT1.2@132.07,317.07 ccw(c197.43,382.43) 197.43,290 ; BUT1.2@139.14,295.86 cw(c173.28,261.72) 173.28,310 cw(c173.28,358.28) 139.14,324.14 ccw(c221.57,406.57) 221.57,290 ; BUT1.2@146.21,288.79 cw(c197.43,237.57) 197.43,310 cw(c197.43,382.43) 146.21,331.21 ccw(c245.71,430.71) 245.71,290 ; 173.28,290 cw(c173.28,358.28) BUT1.2@125,310 391,310 BUT1.2@395,314 ; R35.1@211.51,242.96 ccw(c195.85,258.62) 218,258.62 ; R35.1@218,234 218,289 ; 218,270.71 ccw(c257.25,270.71) R35.1@229.5,242.96 ; 279.29,290 ccw(c279.29,430.71) 378.79,331.21 cw(c327.57,382.43) 327.57,310 cw(c327.57,237.57) BUT1.2@378.79,288.79 ; 303.43,290 ccw(c303.43,406.57) 385.86,324.14 cw(c351.72,358.28) 351.72,310 cw(c351.72,261.72) BUT1.2@385.86,295.86 ; 327.57,290 ccw(c327.57,382.43) BUT1.2@392.93,317.07 ; 351.72,290 ccw(c351.72,358.28) BUT1.2@400,310
NetBUT2_2: BUT2.2 R39.1 | length 1645.5
  Bottom Layer w10: BUT2.2@525,290 800,290 BUT2.2@803,290 ; BUT2.2@531.07,314.07 ccw(c589.18,372.18) 589.18,290 ; BUT2.2@538.14,292.86 cw(c572.28,258.72) 572.28,307 cw(c572.28,355.28) 538.14,321.14 ccw(c613.33,396.33) 613.33,290 ; 555.38,290 ccw(c555.38,275.62) 545.21,285.79 cw(c596.43,234.57) 596.43,307 cw(c596.43,379.43) 545.21,328.21 ccw(c637.47,420.47) 637.47,290 ; 565.04,290 cw(c565.04,348.04) BUT2.2@524,307 794,307 BUT2.2@797,310 ; R39.1@685.5,249.96 ccw(c657.75,277.71) 697,277.71 ; 685.53,290 ccw(c685.53,420.47) 777.79,328.21 cw(c726.57,379.43) 726.57,307 cw(c726.57,234.57) 777.79,285.79 ccw(c767.62,275.62) 767.62,290 ; R39.1@697,237 697,288 ; 697,265.62 ccw(c719.15,265.62) R39.1@703.49,249.96 ; 709.67,290 ccw(c709.67,396.33) 784.86,321.14 cw(c750.72,355.28) 750.72,307 cw(c750.72,258.72) BUT2.2@784.86,292.86 ; 733.82,290 ccw(c733.82,372.18) BUT2.2@791.93,314.07 ; 757.96,290 ccw(c757.96,348.04) BUT2.2@799,307
NetC1_1: C1.1 L2.1 U1.12 | length 403.5
  Bottom Layer w10: U1.12@925.9,1105.5 925.9,1153.94 952.96,1181 1006,1181 1088,1263 C1.1@1088,1264 ; 1006.74,1181.74 ccw(c983.6,1204.87) L2.1@1016.32,1205.33 ; 1009.84,1184.84 cw(c1029.03,1165.64) L2.1@1029.03,1192.79 ; L2.1@1032.97,1218.22 ccw(c1032.97,1242.97) 1050.47,1225.47 ; L2.1@1045.69,1205.5 cw(c1082.34,1205.5) 1056.42,1231.42 ; 1069.99,1244.99 cw(c1096.03,1218.96) C1.1@1096.03,1255.78 ; 1076.12,1251.12 ccw(c1058.74,1268.5) C1.1@1083.32,1268.5 ; C1.1@1089,1263 C1.1@1091,1265
NetC1_2: C1.2 L1.2 U1.13 | length 459.9
  Bottom Layer w10: U1.13@945.58,1105.5 945.58,1122 945.58,1141.54 ; U1.13@946,1122 946,1150 959,1163 1055.5,1163 C1.2@1098,1205.5 ; 1072.93,1180.44 ccw(c1047.86,1205.5) C1.2@1083.32,1205.5 ; 1077.68,1185.19 cw(c1096.03,1166.84) C1.2@1096.03,1192.79 ; C1.2@1095,1202 L1.2@1154,1202 ; C1.2@1108.96,1196.51 cw(c1122.21,1183.26) 1122.21,1202 ; C1.2@1108.96,1214.5 ccw(c1139.13,1244.66) L1.2@1139.13,1202 ; C1.2@1113.46,1202 ccw(c1113.46,1248.08) L1.2@1146.04,1215.5 ; 1135.2,1202 cw(c1135.2,1186.68) L1.2@1146.04,1197.51 ; L1.2@1137.6,1202 ccw(c1137.6,1223.94) L1.2@1153.11,1208.42
NetC4_1: C4.1 U1.6 Y2.1 | length 322.4
  Bottom Layer w10: U1.6@807.79,1105.5 807.79,1158.79 827,1178 827,1202 Y2.1@834,1209 ; Y2.1@855.61,1238 879,1238 879,1245 Y2.1@869,1255 ; Y2.1@880.15,1266.21 ccw(c898,1276.71) 898,1256 ; Y2.1@881,1256 898,1256 ; Y2.1@883.14,1244.54 cw(c898,1240.64) 898,1256 ; 919.94,1274 cw(c919.94,1248.41) C4.1@938.04,1266.5 ; C4.1@937.4,1283.8 cw(c916,1302.26) 916,1274 ; C4.1@951,1274 916,1274 ; 898,1256 916,1274
NetC5_1: C5.1 U1.5 Y2.2 | length 522.7
  Bottom Layer w10: C5.1@569,1260 615,1260 ; C5.1@587.96,1266.49 ccw(c603.62,1282.15) 603.62,1260 ; C5.1@588.09,1248.63 cw(c615,1222.46) 615,1260 ; Y2.2@656.37,1226.46 ccw(c634,1216.53) 634,1241 ; Y2.2@658.92,1254.12 cw(c634,1271.23) 634,1241 ; Y2.2@673,1241 634,1241 ; Y2.2@697.25,1235.17 ccw(c733.21,1261.66) 733.21,1217 ; Y2.2@702.51,1204.09 cw(c733.67,1172.93) 733.67,1217 ; Y2.2@705,1217 753,1217 ; Y2.2@705.3,1241.1 ccw(c753,1276.24) 753,1217 ; U1.5@788.1,1105.5 788.1,1181.9 753,1217 ; 615,1260 634,1241
NetC6_1: C6.1 R7.2 | length 251.9
  Bottom Layer w10: C6.1@3770.87,991 3804,991 ; C6.1@3776.35,979.54 cw(c3804,951.92) 3804,991 ; C6.1@3777.34,1003.38 ccw(c3804,1025.89) 3804,991 ; 3864.41,1051.41 cw(c3887.03,1028.79) R7.2@3887.03,1060.78 ; 3865.7,1052.7 ccw(c3844.91,1073.5) R7.2@3874.32,1073.5 ; R7.2@3880,1069 3880,1067 3804,991
NetC6_2: C6.2 C7.2 D5.2 L3.1 U7.12 | length 808.3
  Bottom Layer w20: 3888.59,883.59 U7.12@3930,883.59
  Bottom Layer w30: D5.2@3639.38,863.7 ccw(c3519.57,983.51) C6.2@3689,983.51 ; D5.2@3658,845.08 D5.2@3688.08,845.08 ; D5.2@3660.59,842.49 ccw(c3592,911.08) v1@3689,911.08 ; D5.2@3676.62,826.45 cw(c3721.59,781.49) 3721.59,845.08 cw(c3721.59,908.67) D5.2@3676.62,863.7 ; D5.2@3687,844 D5.2@3688.08,845.08 ; 3689,958 cw(c3721.1,958) C6.2@3698.4,980.69 ; C6.2@3689,984 3689,846 D5.2@3688.08,845.08 ; 3759.39,845.08 cw(c3759.39,809.3) C7.2@3784.69,834.6 ; C7.2@3789,840 3783.92,845.08 D5.2@3688.08,845.08 ; C7.2@3799,841 3799,845 3831,877 3832,877 3834,879 3882,879 ; C7.2@3809.54,840 cw(c3847.07,840) 3820.53,866.53
  other v1: 3688,911 3687,942
NetC7_1: C7.1 R2.2 | length 229.8
  Bottom Layer w15: C7.1@3785.3,758.43 cw(c3759.45,732.59) 3796,732.59 cw(c3832.55,732.59) C7.1@3806.7,758.43 ; C7.1@3796,769.13 3796,723 3808,711 ; 3808.07,711.07 3831,688.13 R2.2@3831,650 ; R2.2@3825.27,652.19 ccw(c3811.44,666.02) 3831,666.02 ; 3831,673.25 ccw(c3860.77,673.25) R2.2@3839.72,652.19
NetC20_1: C20.1 C54.2 D7.2 L4.2 U7.3 | length 1114.5
  Bottom Layer w15: U7.3@4168,883.59 4231,883.59 ; C54.2@4305,820 C54.2@4305,828 ; C20.1@4370.16,1060.39 cw(c4310.2,1000.43) 4395,1000.43 ; C20.1@4380.77,1071 cw(c4346.41,1036.64) 4395,1036.64 ; C20.1@4395,1069 4395,993 4426,962 v1@4426,935 ; 4426,950.69 ccw(c4442.69,950.69) v1@4430.89,938.89 ; D7.2@4431.93,799.93 D7.2@4433.57,798.28
  Bottom Layer w30: 4231,885 4268,885 4309,844 4309,828 D7.2@4419,828 ; 4278.15,874.85 cw(c4224.3,821) C54.2@4300.46,821 ; C54.2@4315.49,828 cw(c4315.49,689.57) D7.2@4413.38,787.45 ; C54.2@4325.31,815.6 cw(c4355.24,785.66) 4355.24,828 ; 4375.89,828 ccw(c4375.89,905.11) v1@4430.41,850.59 ; 4387.92,828 cw(c4387.92,762) D7.2@4434.59,808.67 ; D7.2@4413.38,824.7 ccw(c4380.48,857.59) v1@4427,857.59 ; v1@4427,881.74 ccw(c4507.66,881.74) D7.2@4450.62,824.7 ; v1@4427,937 v1(4427,935) 4427,804.86 D7.2@4433.57,798.28
  other v1: 4429,852 4429,887
NetC20_2: C20.2 R14.1 | length 236.9
  Bottom Layer w10: R14.1@4211,1087 4296,1087 C20.2@4304,1079 ; R14.1@4219.96,1075.5 cw(c4247.71,1047.75) 4247.71,1087 ; R14.1@4219.96,1093.49 ccw(c4235.62,1109.15) 4235.62,1087 ; 4257.53,1087 cw(c4257.53,1030.44) C20.2@4297.53,1070.43 ; 4277.3,1087 ccw(c4277.3,1115.6) C20.2@4297.53,1095.38 ; 4281.68,1087 cw(c4281.68,1054.58) C20.2@4304.6,1077.5
NetC32_1: C32.1 U6.3 Y1.1 | length 942
  Bottom Layer w10: C32.1@3182,1214 Y1.1@3303,1214 ; C32.1@3183.18,1214 ccw(c3183.18,1328.42) Y1.1@3264.09,1247.51 ; C32.1@3187.89,1222.42 ccw(c3208.23,1242.76) 3208.23,1214 ; C32.1@3194.96,1229.5 ccw(c3232.37,1266.91) 3232.37,1214 ; 3207.33,1214 ccw(c3207.33,1304.28) Y1.1@3271.16,1240.44 ; 3231.47,1214 ccw(c3231.47,1280.14) Y1.1@3278.24,1233.37 ; 3247.82,1214 cw(c3247.82,1190.98) Y1.1@3264.09,1207.26 ; Y1.1@3298,1227.39 3377.39,1227.39 ; Y1.1@3325.26,1214.77 cw(c3354.34,1187.58) 3354.34,1227.39 cw(c3354.34,1267.19) Y1.1@3325.26,1240 ; Y1.1@3332.57,1207.94 cw(c3377.38,1166.02) 3377.38,1227.39 ; Y1.1@3332.57,1246.83 ccw(c3377.38,1288.75) 3377.38,1227.39 ; U6.3@3528,1446 3528,1378 3377.39,1227.39
NetC33_1: C33.1 U6.2 Y1.2 | length 924.3
  Bottom Layer w10: C33.1@3188.89,1429.42 ccw(c3218.87,1459.39) 3218.87,1417 ; C33.1@3195.96,1436.49 ccw(c3243.01,1483.54) 3243.01,1417 ; 3204.8,1417 cw(c3204.8,1327.53) Y1.2@3270.63,1388.11 ; 3227.59,1417 cw(c3227.59,1348.5) Y1.2@3277.99,1394.88 ; 3250.38,1417 cw(c3250.38,1369.47) Y1.2@3285.35,1401.65 ; Y1.2@3263.27,1381.34 ccw(c3182.01,1306.56) 3182.01,1417 3283,1417 Y1.2@3293,1407 ; Y1.2@3298,1400.61 3433.39,1400.61 3453,1381 3484,1381 3503,1400 U6.2@3503,1444 ; Y1.2@3324.84,1387.56 cw(c3356.36,1356.04) 3356.36,1400.61 cw(c3356.36,1445.19) Y1.2@3324.84,1413.67 ; Y1.2@3331.91,1380.49 cw(c3380.5,1331.89) 3380.5,1400.61 cw(c3380.5,1469.33) Y1.2@3331.91,1420.74 ; 3493.06,1390.06 ccw(c3475.58,1407.55) U6.2@3500.31,1407.55
NetC43_1: C43.1 pad.7 U2.20 | length 152.7
  Top Layer w10: U2.20@737.24,1519.5 737.24,1544.24 752,1559 pad.7@765,1559 ; 755.93,1559 ccw(c755.93,1572.07) pad.7@765.17,1562.83
  Bottom Layer w10: C43.1@763.5,1580.04 cw(c752.65,1569.19) 768,1569.19 ; pad.7@765.17,1562.83 ccw(c758.34,1569.66) 768,1569.66 ccw(c777.66,1569.66) pad.7@770.83,1562.83 ; pad.7@768,1559.66 cw(c788.96,1559.66) C43.1@778.71,1577.94 ; pad.7@768,1560 768,1588 C43.1@770,1590 ; pad.7@770,1561 pad.7@772.5,1563.5
NetC44_2: C44.2 pad.8 U2.10 | length 341.7
  Top Layer w10: pad.8@627,1299 698,1299 717.55,1318.55 U2.10@717.55,1358.08 ; pad.8@630.83,1302.83 ccw(c640.07,1312.07) 640.07,1299
  Bottom Layer w10: C44.2@508.35,1267.65 ccw(c496.79,1283) 516,1283 ; C44.2@516,1257.5 516,1283 ; C44.2@523.65,1267.65 cw(c535.21,1283) 516,1283 ; pad.8@625.17,1297.17 ccw(c618.34,1290.34) 618.34,1300 ccw(c618.34,1309.66) pad.8@625.17,1302.83 ; pad.8@626,1300 533,1300 516,1283
NetC50_1: C50.1 R42.2 | length 168.9
  Bottom Layer w10: R42.2@3355,653 3356,652 C50.1@3427,652 ; R42.2@3361.49,641.98 cw(c3385.69,617.78) 3385.69,652 ; R42.2@3361.49,659.96 ccw(c3380.71,679.18) 3380.71,652 ; C50.1@3415.51,643.01 ccw(c3393.8,621.3) 3393.8,652 ccw(c3393.8,682.7) C50.1@3415.51,660.99
NetC50_2: C50.2 R4.2 R43.1 U7.8 | length 998.9
  Bottom Layer w15: R43.1@3418.5,726.82 cw(c3418.5,696.18) 3440.16,717.84 ; R43.1@3421,737 C50.2@3493,665 ; R43.1@3428.71,737.03 ccw(c3447.41,737.03) R43.1@3434.19,723.81 ; 3458.36,699.64 cw(c3412.69,653.97) C50.2@3477.28,653.97 ; C50.2@3480.27,642.81 cw(c3462.83,625.37) 3487.5,625.37 cw(c3512.16,625.37) C50.2@3494.72,642.81 ; 3483.97,674.03 cw(c3463.91,653.97) C50.2@3492.28,653.97 ; 3487.5,632.12 ccw(c3532.65,632.12) R4.2@3500.72,600.19 ; C50.2@3487.5,652 3487.5,600.5 R4.2@3497,591 ; R4.2@3500.72,596.26 ccw(c3527.89,623.43) 3527.89,585 ; R4.2@3506,588 3509,585 3836.28,585 3875,623.72 3875,757 3899.23,781.23 U7.8@3930,781.23 ; 3894.88,776.88 cw(c3909,762.75) 3909,782.73 ccw(c3909,762.75) 3894.88,776.88
NetC51_2: C51.2 U7.9 U7.11 | length 429.8
  Bottom Layer w10: U7.9@3930,806.82 3974.18,806.82 ; U7.11@3930,858 3959,858 3975,842 3975,734 3944,703 C51.2@3944,702 ; C51.2@3947.53,724.38 ccw(c3881.21,790.7) 3975,790.7 ; U7.11@3951,857 cw(c3951,835.27) 3966.36,850.64 ; C51.2@3954.6,717.31 ccw(c3905.35,766.56) 3975,766.56 ; C51.2@3961.67,710.24 ccw(c3929.49,742.42) 3975,742.42
NetC53_1: C53.1 R47.2 | length 112.1
  Bottom Layer w20: C53.1@4607.95,601.51 cw(c4623.62,585.85) 4623.62,608 ; C53.1@4612,608 4676,608 R47.2@4677,607 ; 4664.8,608 ccw(c4664.8,626.74) R47.2@4678.05,613.49 ; 4664.95,608 cw(c4664.95,589.48) R47.2@4678.05,602.58
NetC53_2: C53.2 R17.2 R45.2 U7.7 | length 1068.3
  Bottom Layer w10: U7.7@4168,781.23 4168,628 4224,572 4546,572 ; C53.2@4530.51,615.96 ccw(c4488.29,658.18) 4548,658.18 ; C53.2@4530.7,593.86 cw(c4491.75,553.27) 4548,553.27 ; C53.2@4537.58,608.89 ccw(c4512.43,634.04) 4548,634.04 ; C53.2@4537.62,601.07 cw(c4514.26,576.73) 4548,576.73 ; 4585.47,687 ccw(c4585.47,721.01) R17.2@4609.51,696.96 ; 4590.14,687 cw(c4590.14,659.61) R17.2@4609.51,678.98 ; 4590.73,532 ccw(c4590.73,562.81) R45.2@4612.51,541.02 ; 4590.88,532 cw(c4590.88,501.41) R45.2@4612.51,523.04 ; R17.2@4615,687 4572,687 4548,663 4548,608 4548,554 4570,532 R45.2@4623,532
NetC54_1: C54.1 R46.2 | length 76
  Bottom Layer w30: R46.2@4309,662 C54.1@4309,738
NetD1_1: D1.1 R28.1 | length 507.7
  Top Layer w10: D1.1@1314,1343 1338,1319 ; D1.1@1315.44,1341.56 cw(c1277.89,1304) v1@1331,1304 ; D1.1@1315.97,1332.79 cw(c1315.97,1312.88) 1330.04,1326.96 ; D1.1@1328.53,1343.51 ccw(c1354,1339.47) 1335.76,1321.24 ; 1331,1326 cw(c1321.44,1316.44) v1@1332.47,1308.62 ; 1332.51,1324.49 cw(c1312.03,1304) v1@1341,1304 ; v1@1333.86,1310.13 ccw(c1326.43,1319) 1338,1319 ; v1@1338,1302 1338,1319 ; 1339.38,1317.62 cw(c1331.25,1309.49) v1@1340.63,1302.84 ; v1@1342.76,1311.06 cw(c1347,1319) 1338,1319
  Bottom Layer w10: R28.1@1303.5,1088.96 ccw(c1275.75,1116.71) 1315,1116.71 ; R28.1@1315,1084 1315,1164 1335,1184 v1@1335,1299 ; 1315,1104.62 ccw(c1337.15,1104.62) R28.1@1321.49,1088.96 ; 1335,1275.03 cw(c1367.97,1275.03) v1@1344.66,1298.34
  other v1: 1339,1304
NetD2_1: D2.1 R31.1 | length 174.4
  Top Layer w10: R31.1@4821,1265 D2.1@4899,1265 ; R31.1@4827.49,1255.98 cw(c4849.27,1234.19) 4849.27,1265 ; R31.1@4827.49,1273.96 ccw(c4849.12,1295.59) 4849.12,1265 ; 4877.73,1265 cw(c4877.73,1234.19) D2.1@4899.51,1255.98 ; 4877.88,1265 ccw(c4877.88,1295.59) D2.1@4899.51,1273.96
NetD3_1: D3.1 R32.1 | length 134.5
  Top Layer w20: R32.1@4819,1379 D3.1@4895,1379 ; R32.1@4821.95,1373.51 cw(c4835.2,1360.26) 4835.2,1379 ; R32.1@4821.95,1384.42 ccw(c4835.05,1397.52) 4835.05,1379 ; 4888.8,1379 ccw(c4888.8,1397.74) D3.1@4902.05,1384.49 ; 4888.95,1379 cw(c4888.95,1360.48) D3.1@4902.05,1373.58
NetD4_1: D4.1 R33.1 | length 172.4
  Top Layer w10: R33.1@4819,1509 D4.1@4895,1509 ; R33.1@4825.49,1499.98 cw(c4847.27,1478.19) 4847.27,1509 ; R33.1@4825.49,1517.96 ccw(c4847.12,1539.59) 4847.12,1509 ; 4876.73,1509 ccw(c4876.73,1539.81) D4.1@4898.51,1518.02 ; 4876.88,1509 cw(c4876.88,1478.41) D4.1@4898.51,1500.04
NetD6_1: D6.1 SW1.3 | length 1462
  Top Layer w30: v1@3910,203 4233,203 4338,308 4338,373.33 4497.67,533 SW1.3@4847.89,533 ; SW1.3@4837.28,522.39 ccw(c4811.68,496.79) 4811.68,533 ccw(c4811.68,569.21) 4837.28,543.61 ccw(c4809.26,571.63) 4848.89,571.63 ; SW1.3@4838.28,697.39 cw(c4812.68,671.79) 4848.89,671.79 cw(c4885.1,671.79) SW1.3@4859.5,697.39 ; 4848.89,566.8 ccw(c4881.69,566.8) SW1.3@4858.5,543.61 ; SW1.3@4848.89,708 4848.89,531.11 SW1.3@4850,530
  other v1: 3913,205 3955,206